# Altium PCB SZG-TEMPLATE-STD.PcbDoc (part 1 of 2)
Units mil, origin at the board's own origin, x right, y up, seen from the top; angles counter-clockwise.
Board outline 1771.65 x 2755.91 mil, 4 copper layers (L1-TOP, L2-GND, L3-3.3V, L4-BOT), stack 60.25 mil thick; 64 components, 79 nets, 292 pads, 121 vias.
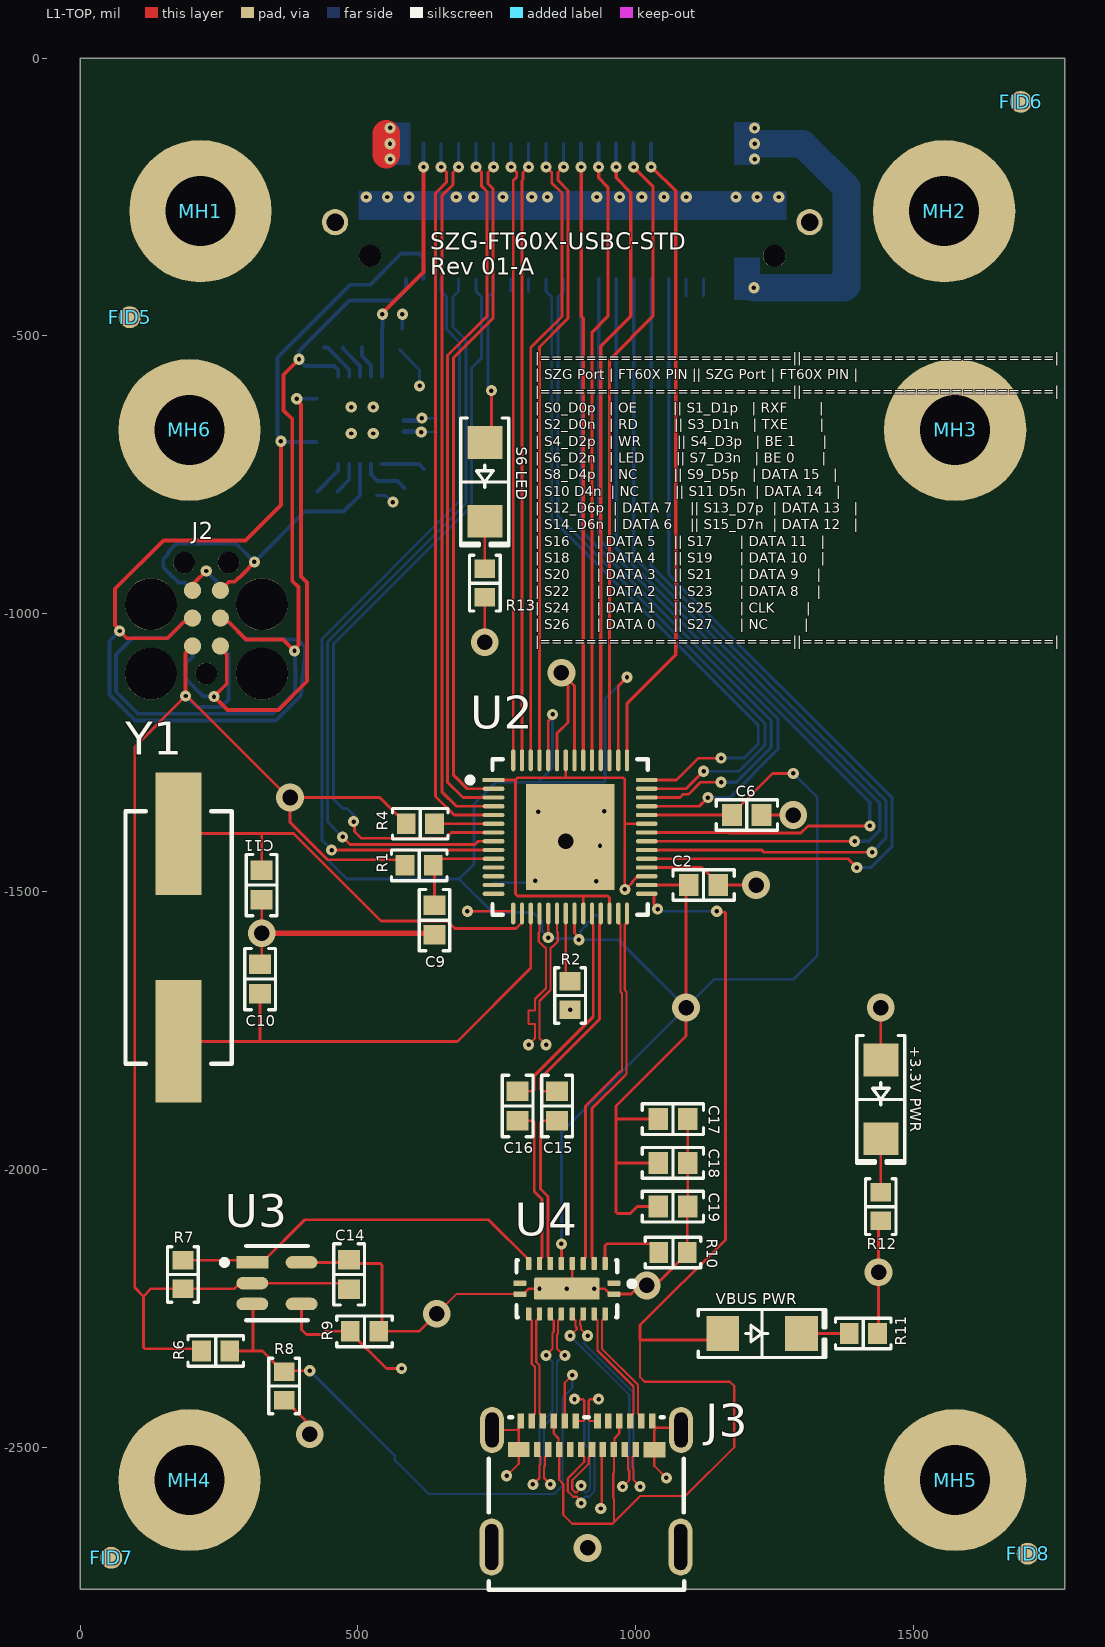
[diagram p0: L1-TOP view]
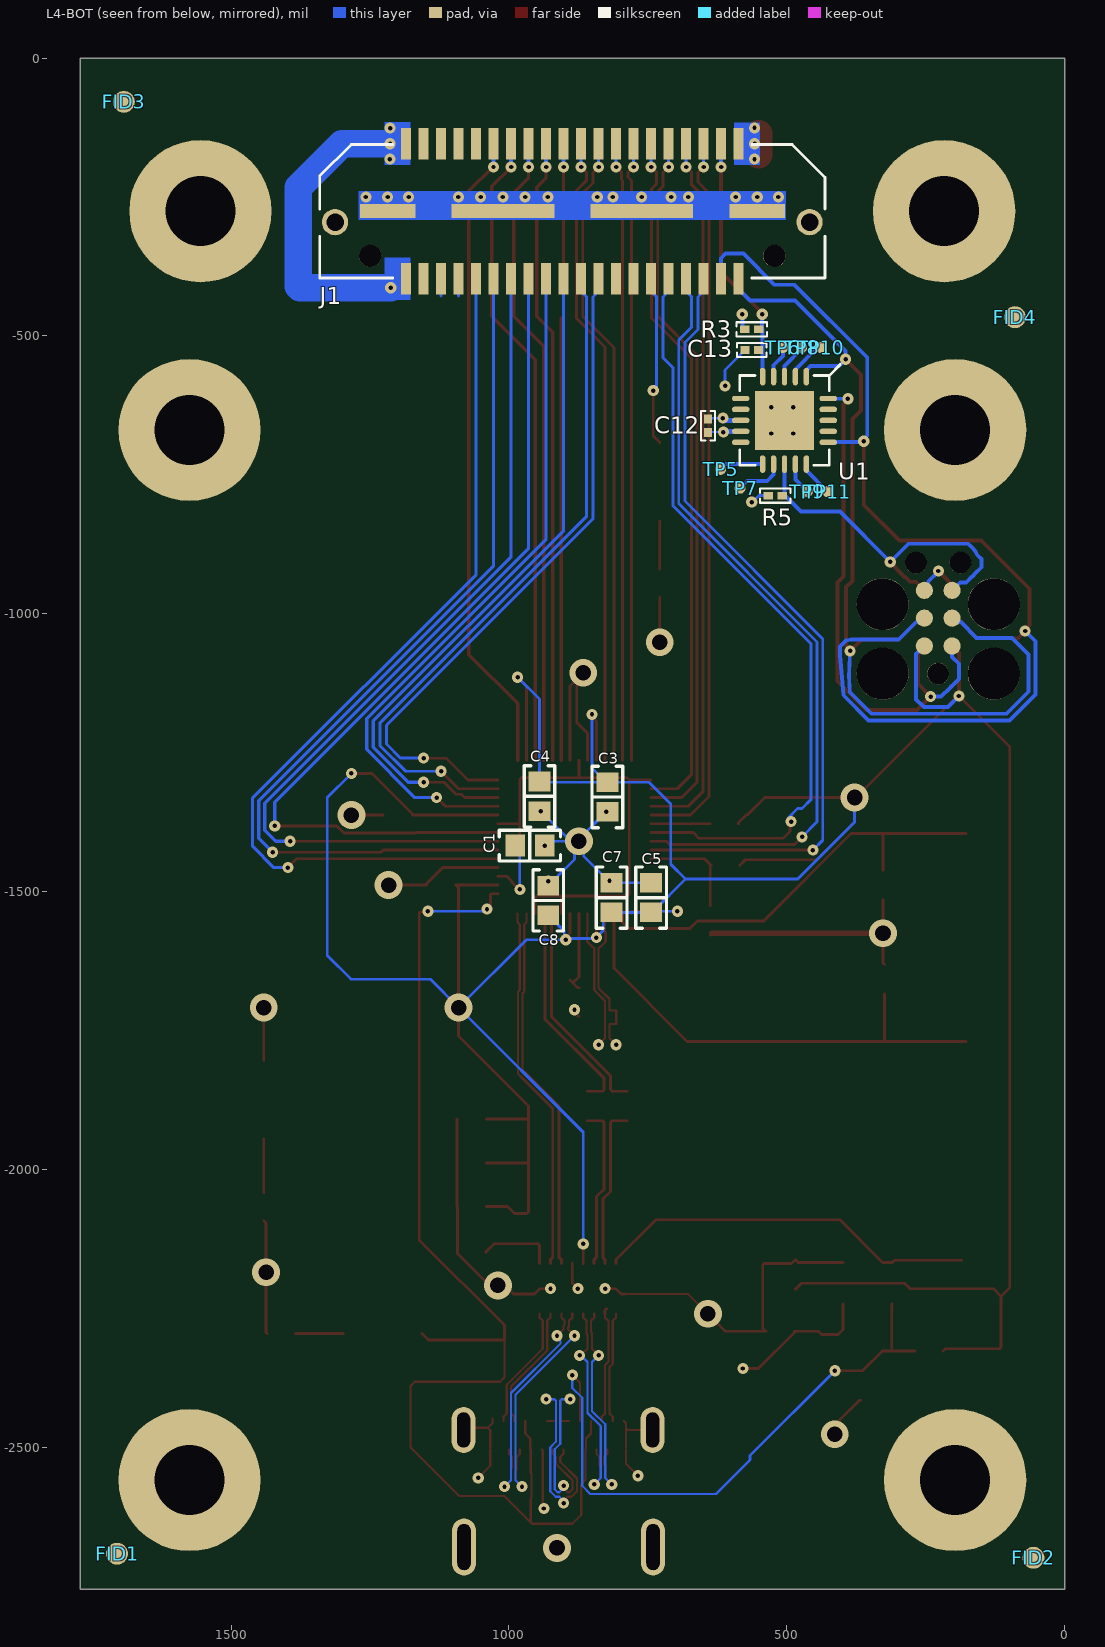
[diagram p1: L4-BOT view, seen from below]
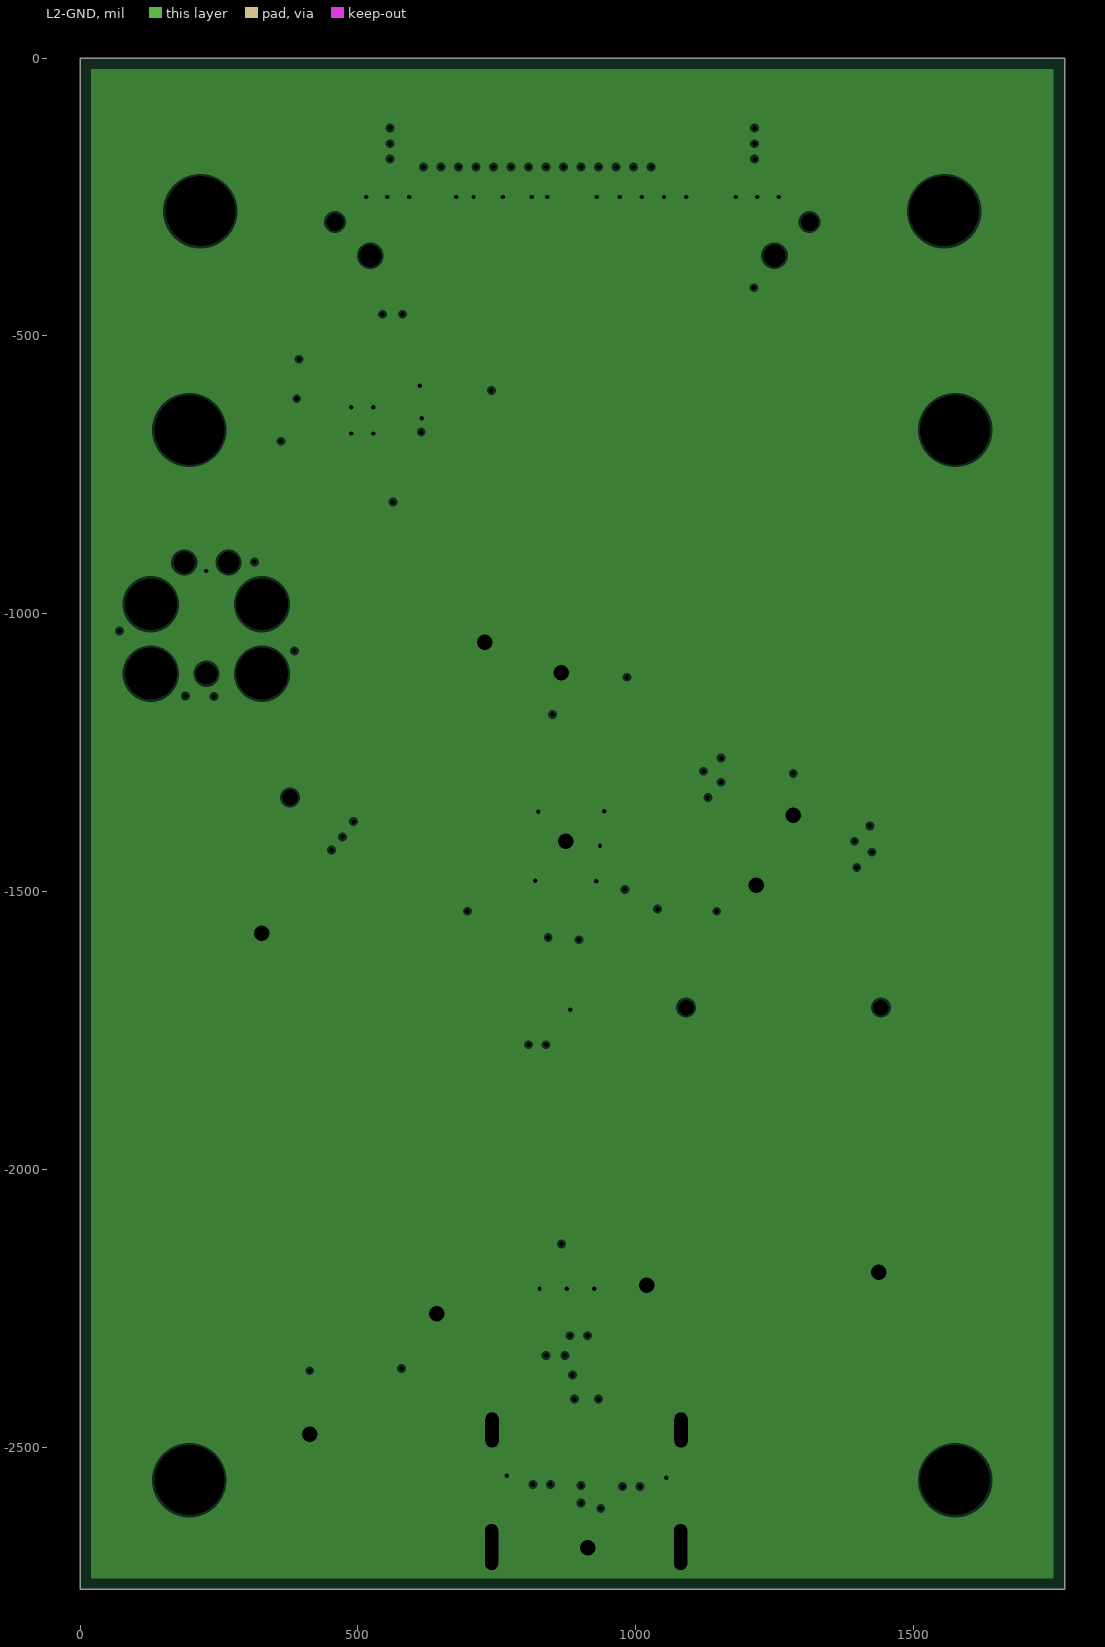
[diagram p2: L2-GND, clearances drawn from the general rule]
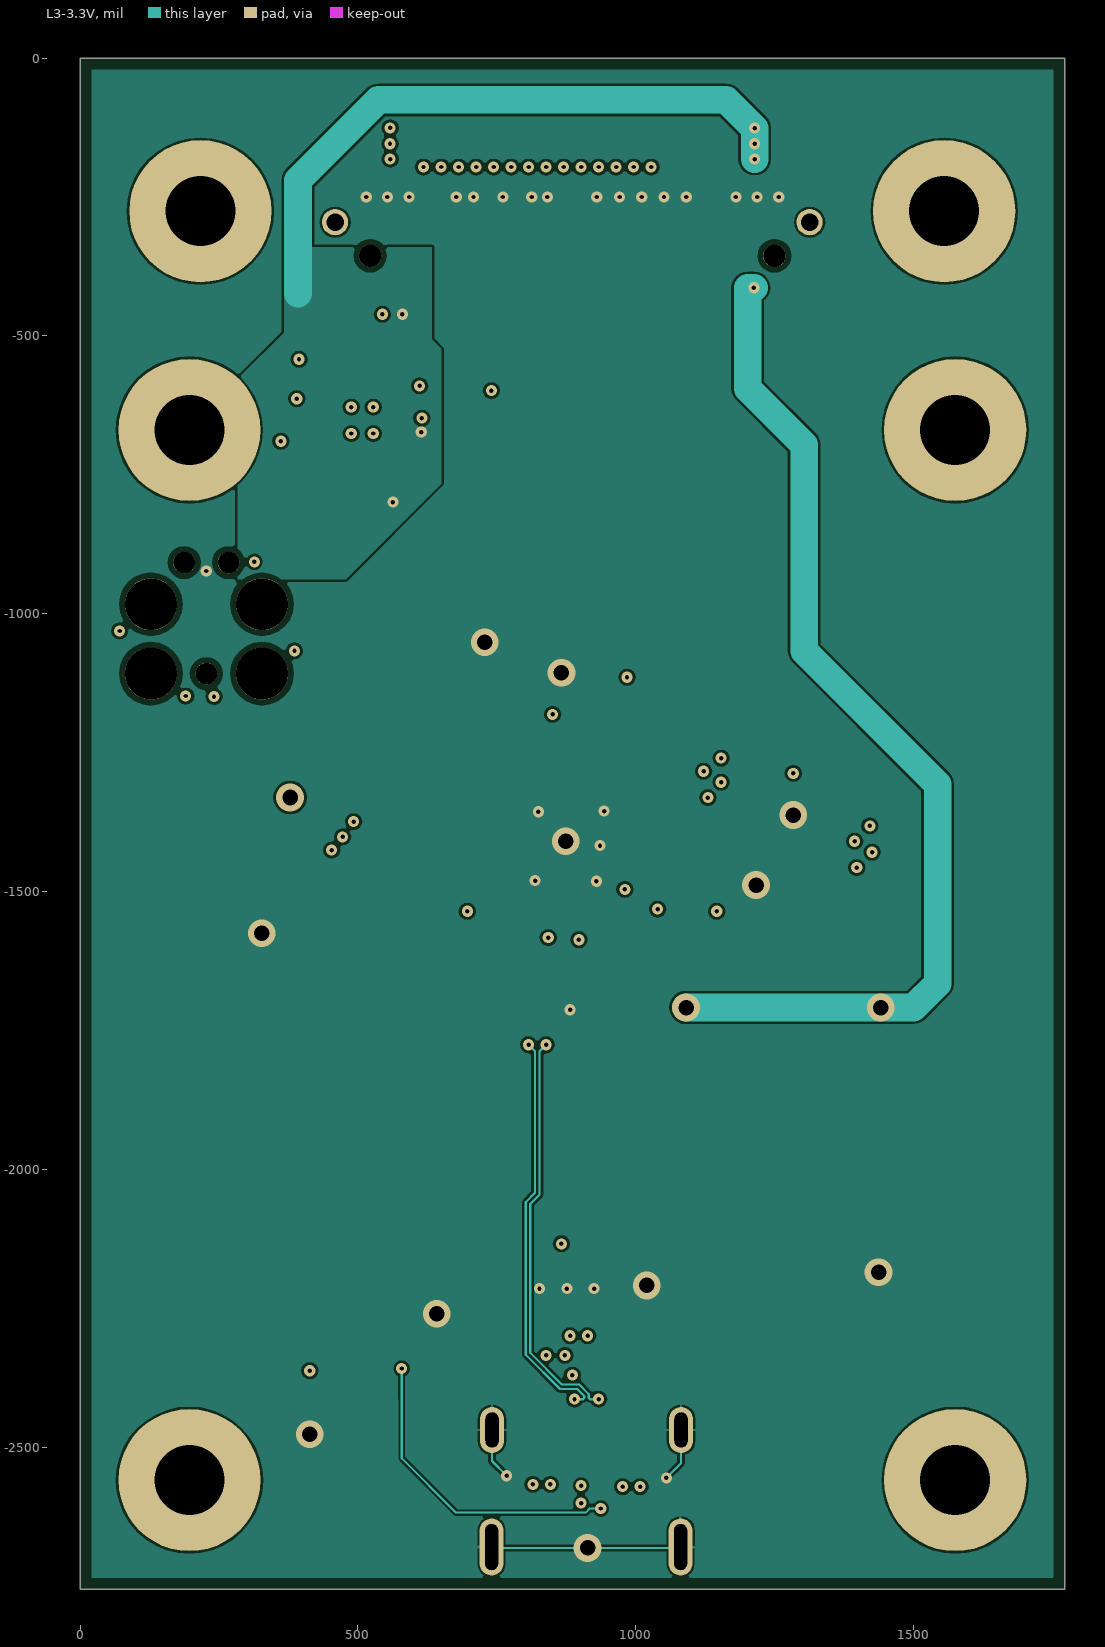
[diagram p3: L3-3.3V]
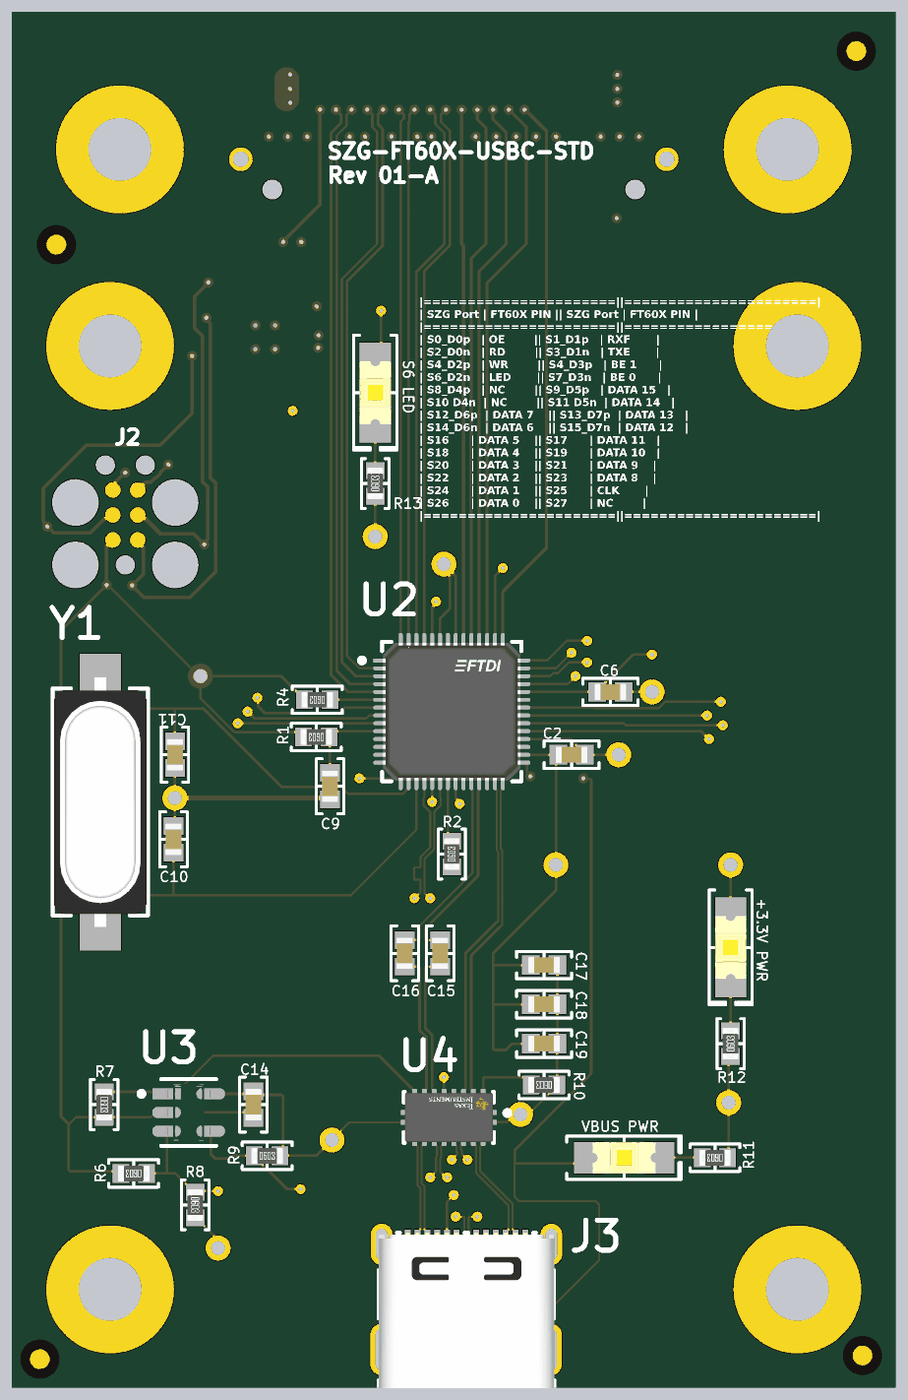
[diagram p5: 3D render of the assembled board from above, using the file's embedded part models]
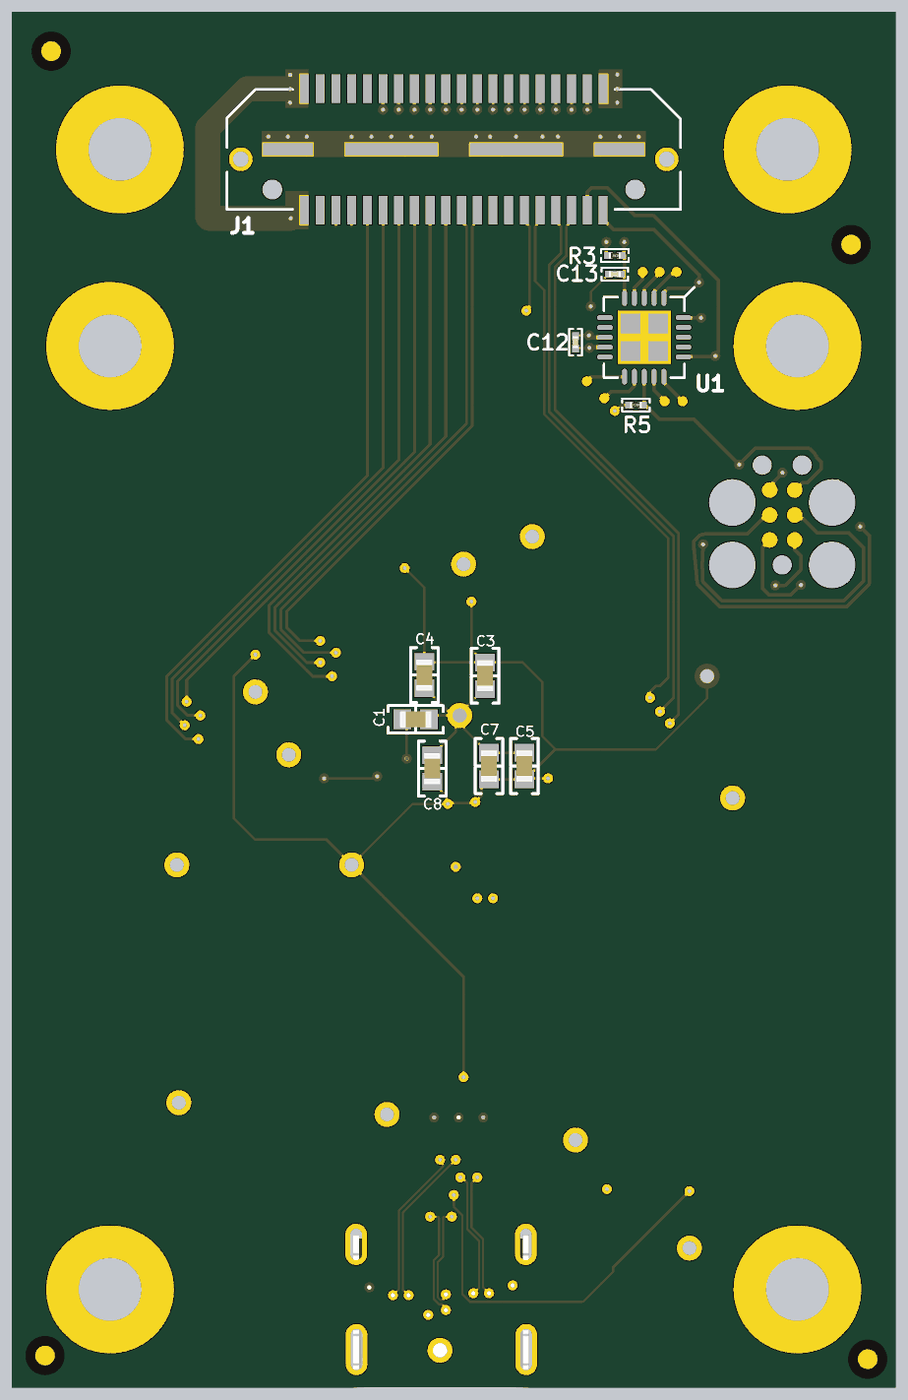
[diagram p6: 3D render of the assembled board from below, using the file's embedded part models]

## Layer stack, top to bottom
Top Solder: solder mask 0.4, Solder Resist, Dk 3.9
L1-TOP: signal copper 1.4
Dielectric1: prepreg 5.08, IT180A, Dk 4.2
L2-GND: plane copper 1.4, net GND
Dielectric2: core 44.49, IT180A, Dk 4.2
L3-3.3V: signal copper 1.4
Dielectric3: prepreg 5.08, IT180A, Dk 4.2
L4-BOT: signal copper 1.4
Bottom Solder: solder mask 0.4, Solder Resist, Dk 3.9

## Board outline
0,-2755.91 1771.65,-2755.91 1771.65,0 0,0

## Design rules (kind name [scope] priority, off if disabled: settings)
BoardOutlineClearance [All] p1: gap=7.87 ignorepadtopadclearanceinfootprint=FALSE
Clearance [All] p1: gap=4 ignorepadtopadclearanceinfootprint=TRUE except(5: Arc-Via Track-Via SMDPad-Via THPad-Via Via-Via Via-Fill Via-Poly Via-Region Via-Text; 10: Arc-Hole Track-Hole SMDPad-Hole THPad-Hole Via-Hole Fill-Hole Poly-Hole Region-Hole Text-Hole)
ComponentClearance [All] p1: gap=4 collisioncheckmode=3 verticalgap=4 showdistances=TRUE
DiffPairsRouting [All] p1: maxlimit=4 minlimit=4 mostfreqgap=4 toplayer_minwidth=4 toplayer_maxwidth=71497.94 toplayer_prefwidth=4 midlayer6_minwidth=4 midlayer6_maxwidth=71497.94 midlayer6_prefwidth=4 bottomlayer_minwidth=4 bottomlayer_maxwidth=71497.94 bottomlayer_prefwidth=4 maxuncoupledlength=500
Height [All] p1: minheight=0 maxheight=71497.94 prefheight=500
HoleSize [All] p1: absolutevalues=TRUE maxlimit=248.03 minlimit=7.87 maxpercent=80.000 minpercent=20.000
HoleToHoleClearance [All] p1: gap=10 allowstackedmicrovias=FALSE
MatchedLengths MatchedLengths_USB_DiffPairs [All] p1: tolerance=5 checknetsindiffpair=TRUE checkdiffpairvsdiffpair=FALSE checkxsignals=FALSE checkothers=FALSE
MinimumAnnularRing [All] p1: minimumring=6
MinimumSolderMaskSliver [All] p1: minsoldermaskwidth=6
PlaneClearance [All] p1: clearance=4
PlaneConnect PlaneConnectPowerPads [InPadClass('PowerPads')] p1: planeconnectstyle=Direct reliefexpansion=20 reliefentries=4 reliefconductorwidth=10 reliefairgap=10
PlaneConnect [All] p2: pad.planeconnectstyle=Relief pad.reliefexpansion=11.81 pad.reliefentries=4 pad.reliefconductorwidth=4 pad.reliefairgap=4 via.planeconnectstyle=Direct via.reliefexpansion=11.81 via.reliefentries=4 via.reliefconductorwidth=5 via.reliefairgap=5
PolygonConnect PolygonConnectPowerPads [All vs (InPadClass('PowerPads'))] p1: connectstyle=Direct reliefconductorwidth=10 reliefentries=4 polygonreliefangle="90 Angle" airgapwidth=10
PolygonConnect [All] p2: thpad.connectstyle=Relief thpad.reliefconductorwidth=4 thpad.reliefentries=4 thpad.polygonreliefangle="90 Angle" thpad.airgapwidth=4 smdpad.connectstyle=Relief smdpad.reliefconductorwidth=4 smdpad.reliefentries=4 smdpad.polygonreliefangle="90 Angle" smdpad.airgapwidth=4 via.connectstyle=Direct via.reliefconductorwidth=5 via.reliefentries=4 via.polygonreliefangle="90 Angle" via.airgapwidth=5
RoomDefinition SZG-TEMPLATE-STD [InComponentClass('SZG-TEMPLATE-STD')] p1: confinementstyle=ConfineIn formatcopy=TRUE lockcomponents=FALSE outline -1685.04,-5834.65 314.96,-5834.65 314.96,-4834.65 -1685.04,-4834.65
RoutingVias [All] p1: holewidth=7.87 width=17.72 viastyle="Through Hole" minholewidth=7.87 minwidth=17.72 maxholewidth=248.03 maxwidth=257.87
SilkToSilkClearance [All] p1: silktosilkclearance=5
SilkToSolderMaskClearance [IsPad] p1: minsilkscreentomaskgap=5 clearancetoexposedcopper=TRUE
SolderMaskExpansion [All] p1: expansion=2 istentingtop=FALSE
UnRoutedNet [All] p1: checkbadconnections=TRUE
Width Power_20mil [All] p1 off: maxlimit=1000 minlimit=10 preferedwidth=20 toplayer_minwidth=20 midlayer6_maxwidth=10 midlayer6_prefwidth=10 bottomlayer_minwidth=20 minimp=50.000000 maximp=50.000000 favimp=50.000000
Width Power_12mil [All] p2 off: maxlimit=1000 minlimit=10 preferedwidth=12 toplayer_minwidth=12 midlayer6_maxwidth=10 midlayer6_prefwidth=10 bottomlayer_minwidth=12 minimp=50.000000 maximp=50.000000 favimp=50.000000
Width Width_10mil [All] p3 off: maxlimit=1000 minlimit=10 preferedwidth=10 midlayer6_maxwidth=10 minimp=50.000000 maximp=50.000000 favimp=50.000000
Width Width_6mil [All] p4 off: maxlimit=1000 minlimit=6 preferedwidth=10 toplayer_prefwidth=6 midlayer6_minwidth=10 midlayer6_maxwidth=10 bottomlayer_prefwidth=6 minimp=50.000000 maximp=50.000000 favimp=50.000000
Width Width_4mil [All] p5: maxlimit=71497.94 minlimit=4 preferedwidth=4 toplayer_maxwidth=1000 bottomlayer_maxwidth=1000 minimp=50.000000 maximp=50.000000 favimp=50.000000
19 further rules are at their usual default settings.

## Classes and differential pairs
component class USBC: C14 C15 C16 C17 C18 C19 J3 R6 R7 R8 R9 R10 U3 U4
component class FTDI_60X: "+3.3v pwr" C1 C2 C3 C4 C5 C6 C7 C8 C9 C10 C11 R1 R2 R4 R11 R12 U2 "VBUS PWR" Y1
component class SZG-TEMPLATE-STD: ASSY1 C12 C13 FID1 FID2 FID3 FID4 FID5 FID6 FID7 FID8 J1 J2 LABEL1 MH1 MH2 MH3 MH4 MH5 MH6 PCB1 R3 R5 R13 "S6 LED" TP5 TP6 TP7 TP8 TP9 TP10 TP11 U1
differential pair D_D: +DA_P -DA_N
differential pair D_DCBLOCKED_TX: +DCBLOCKED_TX_P -DCBLOCKED_TX_N
differential pair D_RX1: +RX1_P -RX1_N
differential pair D_RX2: +RX2_P -RX2_N
differential pair D_RX: +RX_P -RX_N
differential pair D_TX1: +TX1_P -TX1_N
differential pair D_TX2: +TX2_P -TX2_N
differential pair D_TX: +TX_P -TX_N
differential pair DXBLOCKED_TX: +DCBLOCKED_TX_P -DCBLOCKED_TX_N
differential pair DP_C2P_CLK: +C2P_CLKP -C2P_CLKN
differential pair DP_P2C_CLK: +P2C_CLKP -P2C_CLKN

## Components (designator, comment, footprint, x,y, rotation, side; value= is the part's Value field where it differs from the comment)
"+3.3V PWR" "Yellow" "LED 1206_3216 YELLOW" 1440.94,-1874.02 r270 top (schematic designator D2)
C1 "C0402C104K8PACTU" "CAP 0603_1608" 962.2,-1417.32 r0 bottom value="4.7 µF"
C2 "C0402C104K8PACTU" "CAP 0603_1608" 1199.8,-1362.2 r180 top value="0.1 µF"
C3 "0.1 µF" "CAP 0603_1608" 822.83,-1329.72 r90 bottom
C4 "0.1 µF" "CAP 0603_1608" 944.88,-1328.57 r90 bottom
C5 "0.1 µF" "CAP 0603_1608" 744.09,-1510.83 r270 bottom
C6 "0.1 µF" "CAP 0603_1608" 1122.05,-1488.19 r180 top
C7 "0.1 µF" "CAP 0603_1608" 815.13,-1510.83 r270 bottom
C8 "0.1 µF" "CAP 0603_1608" 929.13,-1515.92 r270 bottom
C9 "0.1 µF" "CAP 0603_1608" 637.8,-1551.35 r90 top
C10 "18pF" "CAP 0603_1608" 326.77,-1488.19 r90 top
C11 "18pF" "CAP 0603_1608" 323.99,-1657.48 r270 top
C12 "0.1 µF" "CAP 0201_0603" 641.73,-661.81 r90 bottom
C13 "0.1 µF" "CAP 0201_0603" 562.99,-525.31 r180 bottom
C14 "0.1 µF" "CAP 0603_1608" 484.25,-2188.98 r270 top
C15 "0.1 µF" "CAP 0603_1608" 858.44,-1885.83 r90 top
C16 "0.1 µF" "CAP 0603_1608" 787.4,-1885.83 r90 top
C17 "10000 pF" "CAP 0603_1608" 1066.93,-1909.45 r180 top
C18 "0.1 µF" "CAP 0603_1608" 1066.93,-1988.19 r0 top
C19 "10 µF" "CAP 0603_1608" 1066.93,-2066.93 r180 top
FID1 "FIDUCIAL" FID1MM/2MM-SS 1705.21,-2691.54 r90 bottom
FID2 "FIDUCIAL" FID1MM/2MM-SS 56,-2698.85 r90 bottom
FID3 "FIDUCIAL" FID1MM/2MM-SS 1692.91,-78.74 r90 bottom
FID4 "FIDUCIAL" FID1MM/2MM-SS 89.25,-466.27 r90 bottom
FID5 "FIDUCIAL" FID1MM/2MM-SS 89.25,-466.27 r90 top
FID6 "FIDUCIAL" FID1MM/2MM-SS 1692.91,-78.74 r90 top
FID7 "FIDUCIAL" FID1MM/2MM-SS 56,-2698.85 r90 top
FID8 "FIDUCIAL" FID1MM/2MM-SS 1705.21,-2691.54 r90 top
J1 "QTE-020-01-F-D-A" QTE-020-01-X-D-A-L 885.83,-275.59 r0 bottom
J2 "" TC2030-DUAL 227.36,-1107.87 r90 top
J3 "1054500101" "Molex 1054500101" 911.42,-2478.54 r0 top locked
MH1 "MTG" MTG-3.2/6.5-PTH 216.54,-275.59 r0 top locked
MH2 "MTG" MTG-3.2/6.5-PTH 1555.12,-275.59 r0 top locked
MH3 "MTG" MTG-3.2/6.5-PTH 1574.8,-669.29 r0 top locked
MH4 "MTG" MTG-3.2/6.5-PTH 196.85,-2559.06 r0 top locked
MH5 "MTG" MTG-3.2/6.5-PTH 1574.8,-2559.06 r0 top locked
MH6 "MTG" MTG-3.2/6.5-PTH 196.85,-669.29 r0 top locked
R1 "CRCW040210K0FKED" "RES 0603_1608" 610.24,-1452.76 r180 top value="10 kOhms"
R2 "CRCW040210K0FKED" "RES 0603_1608" 881.89,-1687.01 r90 top value="1.6 kOhms"
R3 "10 kOhms" "RES 0201_0603" 562.99,-488.19 r0 bottom
R4 "CRCW040210K0FKED" "RES 0603_1608" 612.2,-1377.95 r180 top value="10 kOhms"
R5 "10 kOhms" "RES 0201_0603" 520.67,-787.4 r0 bottom
R6 "100 kOhms" "RES 0603_1608" 244.09,-2326.77 r180 top
R7 "10 kOhms" "RES 0603_1608" 185.04,-2188.98 r270 top
R8 "5.1 kOhms" "RES 0603_1608" 367.32,-2389.76 r270 top
R9 "5.1 kOhms" "RES 0603_1608" 511.81,-2291.34 r0 top
R10 "10 kOhms" "RES 0603_1608" 1066.93,-2149.61 r180 top
R11 "150 Ohms" "RES 0603_1608" 1409.45,-2295.28 r180 top
R12 "330 Ohms" "RES 0603_1608" 1440.94,-2066.93 r90 top
R13 "330 Ohms" "RES 0603_1608" 728.35,-944.88 r90 top
"S6 LED" "Yellow" "LED 1206_3216 YELLOW" 728.35,-762.79 r270 top (schematic designator D3)
TP5 "TESTPOINT-SMD20" TP-SMD20 619,-740 r90 bottom
TP6 "TESTPOINT-SMD20" TP-SMD20 507,-521 r90 bottom
TP7 "TESTPOINT-SMD20" TP-SMD20 584,-774 r90 bottom
TP8 "TESTPOINT-SMD20" TP-SMD20 473,-521 r90 bottom
TP9 "TESTPOINT-SMD20" TP-SMD20 463,-780 r90 bottom
TP10 "TESTPOINT-SMD20" TP-SMD20 439,-521 r90 bottom
TP11 "TESTPOINT-SMD20" TP-SMD20 427,-780 r90 bottom
U1 "ATTINY44A-MU" QFN-EP-20 504,-652 r270 bottom
U2 "FT600Q-B-T" FP-QFN-56-MFG 881.89,-1401.57 r0 top
U3 "MIC7221YM5-TR" FP-SOT23-5LD-PL-1-IPC_B 354.33,-2204.72 r0 top
U4 "HD3SS3212RKSR" FP-RKS0020A-MFG 875.98,-2214.57 r270 top
"VBUS PWR" "Yellow" "LED 1206_3216 YELLOW" 1227.35,-2295.28 r0 top (schematic designator D1)
Y1 "30MHz" "ABRACON ABLS" 177.17,-1582.68 r270 top

## Footprints (in the part's own frame and the unit in brackets; to place one, negate y for a bottom-side part, rotate by r counter-clockwise, add the part's x,y. Pads: shape width x height; smd on the part's side, far side on the other; paste and mask are expansions set on the pad)
"ABRACON ABLS" [mm] "Crystal, 2-Leads, Body 4.70x11.40mm, Pitch 8.80mm, IPC Medium Density"
  rect 5.6x2.1 smd: 1(-4.75,0) 2(4.75,0)
  silkscreen extent -5.77,-2.43 5.77,2.43, body extent -6.35,-2.35 6.35,2.35, height 4.2
"CAP 0201_0603" [mm] "Chip Capacitor, 2-Leads, Body 0.60x0.30mm, IPC Medium Density"
  rect 0.4x0.35 smd: 1(-0.31,0) 2(0.31,0)
  silkscreen extent -0.67,-0.33 0.67,0.33, body extent -0.3,-0.15 0.3,0.15, height 0.3
"CAP 0603_1608" [mm] "Chip Capacitor, 2-Leads, Body 1.60x0.80mm, IPC Medium Density"
  rect 0.9x1 smd: 1(-0.675,0) 2(0.675,0)
  silkscreen extent -1.4,-0.7 1.4,0.7, body extent -0.8,-0.41 0.8,0.41, height 0.82
FID1MM/2MM-SS [mm] "Fiducial 1mm copper, 2mm soldermask, single-side"
  round 1 smd paste-0.5 mask+0.5: FID?(0,0)
FP-QFN-56-MFG [mm]
  rect 1x0.2 smd paste+0 mask+0: 1(-3.5,2.6)
  rrect100% 1x0.2 smd paste+0 mask+0: 2(-3.5,2.2) 3(-3.5,1.8) 4(-3.5,1.4) 5(-3.5,1) 6(-3.5,0.6) 7(-3.5,0.2) 8(-3.5,-0.2) 9(-3.5,-0.6) 10(-3.5,-1) 11(-3.5,-1.4) 12(-3.5,-1.8) 13(-3.5,-2.2) 14(-3.5,-2.6) 29(3.5,-2.6) 30(3.5,-2.2) 31(3.5,-1.8) 32(3.5,-1.4) 33(3.5,-1) 34(3.5,-0.6) 35(3.5,-0.2) 36(3.5,0.2) 37(3.5,0.6) 38(3.5,1) 39(3.5,1.4) 40(3.5,1.8) 41(3.5,2.2) 42(3.5,2.6)
  rrect100% 0.2x1 smd paste+0 mask+0: 15(-2.6,-3.5) 16(-2.2,-3.5) 17(-1.8,-3.5) 18(-1.4,-3.5) 19(-1,-3.5) 20(-0.6,-3.5) 21(-0.2,-3.5) 22(0.2,-3.5) 23(0.6,-3.5) 24(1,-3.5) 25(1.4,-3.5) 26(1.8,-3.5) 27(2.2,-3.5) 28(2.6,-3.5) 43(2.6,3.5) 44(2.2,3.5) 45(1.8,3.5) 46(1.4,3.5) 47(1,3.5) 48(0.6,3.5) 49(0.2,3.5) 50(-0.2,3.5) 51(-0.6,3.5) 52(-1,3.5) 53(-1.4,3.5) 54(-1.8,3.5) 55(-2.2,3.5) 56(-2.6,3.5)
  rect 4.05x4.85 smd paste+0 mask+0: 57(0,0)
  silkscreen extent -4.7,-3.55 3.55,3.55, body extent -4.1,-4.1 4.1,4.1, height 0.25
FP-RKS0020A-MFG [mm]
  rrect40% 0.25x0.6 smd paste+0 mask+0: 1(-0.25,2.15) 10(-0.25,-2.15) 11(0.25,-2.15) 20(0.25,2.15)
  rrect40% 0.6x0.25 smd paste+0 mask+0: 2(-1.15,1.75) 3(-1.15,1.25) 4(-1.15,0.75) 5(-1.15,0.25) 6(-1.15,-0.25) 7(-1.15,-0.75) 8(-1.15,-1.25) 9(-1.15,-1.75) 12(1.15,-1.75) 13(1.15,-1.25) 14(1.15,-0.75) 15(1.15,-0.25) 16(1.15,0.25) 17(1.15,0.75) 18(1.15,1.25) 19(1.15,1.75)
  rrect10% 1x3 smd paste-1000 mask+0: 21(0,0)
  silkscreen extent -1.3,-2.3 1.3,3.1, body extent -1.55,-2.55 1.55,2.55, height 0.25
FP-SOT23-5LD-PL-1-IPC_B [mm]
  rect 1.456x0.57 smd paste+0 mask+0: 1(-1.125,0.95)
  rrect100% 1.456x0.57 smd paste+0 mask+0: 2(-1.125,0) 3(-1.125,-0.95) 4(1.125,-0.95) 5(1.125,0.95)
  silkscreen extent -2.53,-1.7 1.4,1.7, body extent -2.1,-1.7 2.1,1.7, height 0.25
"LED 1206_3216 YELLOW" [mm] "Chip Diode, 2-Leads, Body 3.13x1.55mm, IPC Medium Density"
  rect 1.5x1.6 smd: 1(-1.8,0) 2(1.8,0)
  silkscreen extent -2.92,-1.1 2.92,1.1, body extent -1.6,-0.8 1.6,0.8, height 0.9
"Molex 1054500101" [mm] "USB-C Receptacle Connector 24 Position Surface Mount, 24 Position, Body 8.94x7.90mm"
  rect 0.3x0.7 smd: A1(-3,0.655) A2(-2.5,0.655) A3(-2,0.655) A4(-1.5,0.655) A5(-1,0.655) A6(-0.5,0.655) A7(0.5,0.655) A8(1,0.655) A9(1.5,0.655) A10(2,0.655) A11(2.5,0.655) A12(3,0.655) B2(2.25,-0.645) B3(1.75,-0.645) B4(1.25,-0.645) B5(0.75,-0.645) B6(0.25,-0.645) B7(-0.25,-0.645) B8(-0.75,-0.645) B9(-1.25,-0.645) B10(-1.75,-0.645) B11(-2.25,-0.645)
  rect 1x0.7 smd: B1(3.1,-0.655) B12(-3.1,-0.645)
  oval 1.1x2.6 hole 2.1 slot 0.6 at 0 deg unplated: S(-4.34,-5.105) S(4.3,-5.105)
  oval 1.1x2.1 hole 1.6 slot 0.6 at 0 deg unplated: S(-4.32,0.245) S(4.32,0.245)
  silkscreen extent -4.47,-7.07 4.47,0.83, body extent -4.47,-7.07 4.47,0.83, height 3.21
MTG-3.2/6.5-PTH [mm] "Mounting hole, 3.2mm ID, 6.5mm OD, plated"
  round 6.5 hole 3.2: 1(0,0)
QFN-EP-20 [mm]
  oval 0.8x0.25 smd mask+0.051: 1(-2,1) 2(-2,0.5) 3(-2,0) 4(-2,-0.5) 5(-2,-1) 11(2,-1) 12(2,-0.5) 13(2,0) 14(2,0.5) 15(2,1)
  oval 0.25x0.8 smd mask+0.051: 6(-1,-2) 7(-0.5,-2) 8(0,-2) 9(0.5,-2) 10(1,-2) 16(1,2) 17(0.5,2) 18(0,2) 19(-0.5,2) 20(-1,2)
  rect 2.7x2.7 smd paste-100 mask+0.051: PAD(0,0)
  silkscreen extent -2.55,-2.05 2.05,2.55
QTE-020-01-X-D-A-L [mm] "0.80mm, 40 pin Surface Mount connectors with Ground Strip"
  rect 2.54x0.64 smd paste+0: 0(-8.445,0) 0(8.445,0)
  rect 4.699x0.64 smd paste+0: 0(-3.175,0) 0(3.175,0)
  rect 0.46x1.45 smd paste+0: 1(-7.6,3.09) 2(-7.6,-3.09) 3(-6.8,3.09) 4(-6.8,-3.09) 5(-5.999,3.09) 6(-5.999,-3.09) 7(-5.199,3.09) 8(-5.199,-3.09) 9(-4.399,3.09) 10(-4.399,-3.09) 11(-3.599,3.09) 12(-3.599,-3.09) 13(-2.799,3.09) 14(-2.799,-3.09) 15(-1.999,3.09) 16(-1.999,-3.09) 17(-1.199,3.09) 18(-1.199,-3.09) 19(-0.399,3.09) 20(-0.399,-3.09) 21(0.401,3.09) 22(0.401,-3.09) 23(1.201,3.09) 24(1.201,-3.09) 25(2.002,3.09) 26(2.002,-3.09) 27(2.802,3.09) 28(2.802,-3.09) 29(3.602,3.09) 30(3.602,-3.09) 31(4.402,3.09) 32(4.402,-3.09) 33(5.202,3.09) 34(5.202,-3.09) 35(6.002,3.09) 36(6.002,-3.09) 37(6.802,3.09) 38(6.802,-3.09) 39(7.602,3.09) 40(7.602,-3.09)
  round 1.2 hole 0.8 paste-2539.97: MH(-10.845,0.5) MH(10.845,0.5)
  round 1.02 hole 1.02 unplated paste-2539.97: MH(-9.24,2.04) MH(9.24,2.04)
  silkscreen extent -11.55,-3.05 11.55,3.05
"RES 0201_0603" [mm] "Chip Resistor, 2-Leads, Body 0.60x0.30mm, IPC Medium Density"
  rect 0.44x0.35 smd: 1(-0.325,0) 2(0.325,0)
  silkscreen extent -0.7,-0.33 0.7,0.33, body extent -0.3,-0.15 0.3,0.15, height 0.21
"RES 0603_1608" [mm] "Chip Resistor, 2-Leads, Body 1.60x0.80mm, IPC Medium Density"
  rect 0.85x0.95 smd: 1(-0.65,0) 2(0.65,0)
  silkscreen extent -1.27,-0.7 1.27,0.7, body extent -0.8,-0.4 0.8,0.4, height 0.45
TC2030-DUAL [mil]
  round 31 smd paste-393.7: 1(50,-25) 2(50,25) 3(100,-25) 4(100,25) 5(150,-25) 6(150,25)
  round 31 smd far side paste-393.7: 1(50,25) 2(50,-25) 3(100,25) 4(100,-25) 5(150,25) 6(150,-25)
  round 39 hole 39 unplated: A(0,0) B(200,40) C(200,-40)
  round 93.5 hole 93.5 unplated: D(0,-100) E(125,-100) F(0,100) G(125,100)
TP-SMD20 [mil] "Test point, surface-mount, 20mil"
  round 20 smd paste-78.74: 1(0,0)

## Part data
"+3.3V PWR" "S6 LED" "VBUS PWR": library part CMD11-21VYC/TR8, "LED YELLOW CLEAR 1206 SMD", Current - Test=20mA, Device Package="1206 (3216 Metric)", Lens Color=1.50mm, Manufacturer="Visual Communications Company - VCC", Millicandela Rating=6mcd, Supplier Device Package=1206, Supplier Part Number 1=28-CMD11-21VYC/TR8CT-ND, Voltage - Forward (Vf) (Typ)=2V, Color=Yellow, componentlink1description=Datasheet, componentlink1url=https://vcclite.com/wp-content/uploads/wpallimport/files/files/CMD11-21%20SMT%20LEDs%201206%20Package%20Size.pdf, componentlink2description="DigiKey Link", componentlink2url=https://www.digikey.com/en/products/detail/visual-communications-company-vcc/CMD11-21VYC-TR8/254830, Configuration=Standard, Height (Max)=1.50mm, lastupdated="12/21/2023 9:31:44 PM", Lens Size="1.10mm Dia", Lens Style="Round with Flat Top", Lens Transparency=Clear, Lifecycle Status=Active, Minimum Order=1, Mounting Type="Surface Mount", Package / Case="1206 (3216 Metric)", packaging=TapeAndReel, Part Number=CMD11-21VYC/TR8, Part Status=Active, partid=6, price=0.22, series=-, Size / Dimension="3.00mm L x 1.50mm W", Supplier 1=DigiKey, Viewing Angle=20°, Wavelength - Peak=585nm
C1: library part CL10A475KA8NQNC, "CAP CER 4.7UF 25V X5R 0603", Capacitance="4.7 µF", Device Package="0603 (1608 Metric)", Manufacturer="Samsung Electro-Mechanics", Operating Temperature="-55°C ~ 85°C", Supplier Part Number 1=1276-1900-1-ND, Temperature Coefficient=X5R, Tolerance=±10%, Voltage - Rated=25V, Applications="General Purpose", componentlink1description=Datasheet, componentlink1url=http://www.samsungsem.com/kr/support/product-search/mlcc/CL10A475KA8NQNC.jsp, componentlink2description="DigiKey Link", componentlink2url=https://www.digikey.com/en/products/detail/samsung-electro-mechanics/CL10A475KA8NQNC/3887558, lastupdated="12/20/2023 8:09:25 PM", Lifecycle Status=Active, Minimum Order=1, Mounting Type="Surface Mount, MLCC", Package / Case="0603 (1608 Metric)", packaging=TapeAndReel, Part Number=CL10A475KA8NQNC, Part Status=Active, partid=2349, price=0.06, series=CL, Size / Dimension="0.063\" L x 0.031\" W (1.60mm x 0.80mm)", Supplier 1=DigiKey, Thickness (Max)="0.035\" (0.90mm)"
C2: library part C0603C104K5RAC7411, "CAP CER 0.1UF 50V X7R 0603", Capacitance="0.1 µF", Device Package="0603 (1608 Metric)", Manufacturer=KEMET, Operating Temperature="-55°C ~ 125°C", Supplier Part Number 1=399-C0603C104K5RAC7411CT-ND, Temperature Coefficient=X7R, Tolerance=±10%, Voltage - Rated=50V, Applications="Bypass, Decoupling", componentlink1description=Datasheet, componentlink1url=https://api.kemet.com/component-edge/download/datasheet/C0603C104K5RAC7411.pdf, componentlink2description="DigiKey Link", componentlink2url=https://www.digikey.com/en/products/detail/kemet/C0603C104K5RAC7411/3317013, lastupdated="12/20/2023 8:09:25 PM", Lifecycle Status=Active, Minimum Order=1, Mounting Type="Surface Mount, MLCC", Package / Case="0603 (1608 Metric)", packaging=TapeAndReel, Part Number=C0603C104K5RAC7411, Part Status=Active, partid=2233, price=0.01, series="SMD Comm X7R", Size / Dimension="0.063\" L x 0.031\" W (1.60mm x 0.80mm)", Supplier 1=DigiKey, Thickness (Max)="0.035\" (0.90mm)"
C3 C4 C5 C6 C7 C8 C9 C14 C15 C16 C18: library part C0603C104K5RAC7411, "CAP CER 0.1UF 50V X7R 0603", Device Package="0603 (1608 Metric)", Manufacturer=KEMET, Operating Temperature="-55°C ~ 125°C", Supplier Part Number 1=399-C0603C104K5RAC7411CT-ND, Temperature Coefficient=X7R, Tolerance=±10%, Voltage - Rated=50V, Applications="Bypass, Decoupling", Capacitance="0.1 µF", componentlink1description=Datasheet, componentlink1url=https://api.kemet.com/component-edge/download/datasheet/C0603C104K5RAC7411.pdf, componentlink2description="DigiKey Link", componentlink2url=https://www.digikey.com/en/products/detail/kemet/C0603C104K5RAC7411/3317013, lastupdated="12/20/2023 8:09:25 PM", Lifecycle Status=Active, Minimum Order=1, Mounting Type="Surface Mount, MLCC", Package / Case="0603 (1608 Metric)", packaging=TapeAndReel, Part Number=C0603C104K5RAC7411, Part Status=Active, partid=2233, price=0.01, series="SMD Comm X7R", Size / Dimension="0.063\" L x 0.031\" W (1.60mm x 0.80mm)", Supplier 1=DigiKey, Thickness (Max)="0.035\" (0.90mm)"
C10 C11: library part SQCSVA180JAT1A, "CAP CER 18PF 250V 0603", Device Package="0603 (1608 Metric)", Manufacturer="AVX Corporation", Operating Temperature="-55°C ~ 125°C", Supplier Part Number 1=478-3505-1-ND, Temperature Coefficient=A, Tolerance=±5%, Voltage - Rated=250V, Applications="RF, Microwave, High Frequency", Capacitance=18pF, componentlink1description=Datasheet, componentlink1url=http://datasheets.avx.com/sqcs-sqcf.pdf, componentlink2description="DigiKey Link", componentlink2url=http://digikey.com/product-detail/en/avx-corporation/SQCSVA180JAT1A/478-3505-1-ND/1000464, Features="High Q, Low Loss", lastupdated="9/2/2020 1:03:34 AM", Lifecycle Status=Active, Minimum Order=1, Mounting Type="Surface Mount, MLCC", Package / Case="0603 (1608 Metric)", packaging=TapeAndReel, Part Number=SQCSVA180JAT1A, Part Status=Active, partid=2987, price=0.22, series=SQ, Size / Dimension="0.063\" L x 0.032\" W (1.60mm x 0.81mm)", Supplier 1=DigiKey, Thickness (Max)="0.030\" (0.76mm)"
C12 C13: library part EMK063BJ104KP-F, "CAP CER 0.1UF 16V X5R 0201", Device Package="0201 (0603 Metric)", Manufacturer="Taiyo Yuden", Operating Temperature="-55°C ~ 85°C", Supplier Part Number 1=587-5833-1-ND, Temperature Coefficient=X5R, Tolerance=±10%, Voltage - Rated=16V, Applications="SMPS Filtering", Capacitance="0.1 µF", componentlink1description=Datasheet, componentlink1url="https://ds.yuden.co.jp/TYCOMPAS/ut/detail?pn=EMK063BJ104KP-F  &u=M", componentlink2description="DigiKey Link", componentlink2url=https://www.digikey.com/en/products/detail/taiyo-yuden/EMK063BJ104KP-F/4970625, lastupdated="12/20/2023 8:01:02 PM", Lifecycle Status=Active, Minimum Order=1, Mounting Type="Surface Mount, MLCC", Package / Case="0201 (0603 Metric)", packaging=TapeAndReel, Part Number=EMK063BJ104KP-F, Part Status=Active, partid=12, price=0.01, series=M, Size / Dimension="0.024\" L x 0.012\" W (0.60mm x 0.30mm)", Supplier 1=DigiKey, Thickness (Max)="0.013\" (0.33mm)"
C17: library part C0603X103K1RAC3316, "CAP CER 0603 10NF 100V X7R", Device Package="0603 (1608 Metric)", Manufacturer=KEMET, Operating Temperature="-55°C ~ 125°C", Ratings=AEC-Q200, Supplier Part Number 1=399-C0603X103K1RAC3316CT-ND, Temperature Coefficient=X7R, Tolerance=±10%, Voltage - Rated=100V, Applications="Automotive, Boardflex Sensitive", Capacitance="10000 pF", componentlink1description=Datasheet, componentlink1url=https://api.kemet.com/component-edge/download/datasheet/C0603X103K1RAC3316.pdf, componentlink2description="DigiKey Link", componentlink2url=https://www.digikey.com/en/products/detail/kemet/C0603X103K1RAC3316/10315782, Features="Soft Termination", lastupdated="12/20/2023 8:09:17 PM", Lifecycle Status=Active, Minimum Order=1, Mounting Type="Surface Mount, MLCC", Package / Case="0603 (1608 Metric)", packaging=TapeAndReel, Part Number=C0603X103K1RAC3316, Part Status=Active, partid=8591, price=0.07, series="SMD Auto X7R VW80808", Size / Dimension="0.063\" L x 0.031\" W (1.60mm x 0.80mm)", Supplier 1=DigiKey, Thickness (Max)="0.037\" (0.95mm)"
C19: library part GRT188R61C106ME13D, "CAP CER 10UF 16V X5R 0603", Device Package="0603 (1608 Metric)", Manufacturer="Murata Electronics", Operating Temperature="-55°C ~ 85°C", Ratings=AEC-Q200, Supplier Part Number 1=490-12318-1-ND, Temperature Coefficient=X5R, Tolerance=±20%, Voltage - Rated=16V, Applications=Automotive, Capacitance="10 µF", componentlink1description=Datasheet, componentlink1url=https://search.murata.co.jp/Ceramy/image/img/A01X/G101/ENG/GRT188R61C106ME13-01.pdf, componentlink2description="DigiKey Link", componentlink2url=https://www.digikey.com/en/products/detail/murata-electronics/GRT188R61C106ME13D/5416740, lastupdated="12/20/2023 8:09:24 PM", Lifecycle Status=Active, Minimum Order=1, Mounting Type="Surface Mount, MLCC", Package / Case="0603 (1608 Metric)", packaging=TapeAndReel, Part Number=GRT188R61C106ME13D, Part Status=Active, partid=2515, price=0.06, series=GRT, Size / Dimension="0.063\" L x 0.031\" W (1.60mm x 0.80mm)", Supplier 1=DigiKey, Thickness (Max)="0.035\" (0.90mm)"
FID1 FID2 FID3 FID4 FID5 FID6 FID7 FID8: "PCB fiducial"
J1: library part 000973, Manufacturer=Samtec, created_on="4/3/2013 1:34:16 PM", id=24153, inventory_price=3.86, Manufacturer_PN=QTE-020-01-F-D-A, PartNumber=000973, parttype=Connector, rohs=1, updated_on="2/26/2018 2:13:14 PM"
J2: library part 002062, "Tag-Connect 6-pin Plug-of-Nails spring-pin cable footprint", Manufacturer=Tag-Connect, Manufacturer_PN=TC2030-IDC, AligniPartNumber=002062, parttype=Connector
J3: "CONN RCP USB3.1 TYPEC 24P SMD RA", Current Rating (Amps)="0.25A, 1A, 5A", Manufacturer=Molex, Operating Temperature="-30°C ~ 85°C", Supplier Part Number 1=WM12856CT-ND, Voltage - Rated=30VAC/DC, componentlink1description=Datasheet, componentlink1url=https://www.molex.com/pdm_docs/ps/PS-105448-001.pdf, componentlink2description="DigiKey Link", componentlink2url=http://digikey.com/product-detail/en/molex/1054500101/WM12856CT-ND/5843891, Connector Type="USB - C (Type - C)", Gender=Receptacle, lastupdated="6/6/2020 2:14:04 AM", Lifecycle Status=Active, Mating Cycles=10000, Minimum Order=1, Mounting Feature=Horizontal, Mounting Type="Surface Mount, Right Angle; Through Hole", Number of Contacts=24, Number of Ports=1, packaging=TapeAndReel, Part Number=1054500101, Part Status=Active, price=1.22, series=105445, Shielding=Shielded, Specifications="USB 3.1 (USB 3.1 Gen 2, Superspeed+)", Supplier 1=DigiKey, Termination=Solder
MH1 MH2 MH3 MH4 MH5 MH6: "Mounting hole"
R1 R4: library part RT0603FRE0710KL, "RES SMD 10K OHM 1% 1/10W 0603", Device Package="0603 (1608 Metric)", Manufacturer=Yageo, Operating Temperature="-55°C ~ 155°C", Power (Watts)="0.1W, 1/10W", Resistance="10 kOhms", Supplier Device Package=0603, Supplier Part Number 1=YAG2321CT-ND, Temperature Coefficient=±50ppm/°C, Tolerance=±1%, componentlink1description=Datasheet, componentlink1url=https://www.yageo.com/upload/media/product/productsearch/datasheet/rchip/PYu-RT_1-to-0.01_RoHS_L_11.pdf, componentlink2description="DigiKey Link", componentlink2url=https://www.digikey.com/en/products/detail/yageo/RT0603FRE0710KL/1075040, Composition="Thin Film", Height - Seated (Max)="0.022\" (0.55mm)", lastupdated="12/20/2023 8:39:02 PM", Lifecycle Status=Active, Minimum Order=1, Number of Terminations=2, Package / Case="0603 (1608 Metric)", packaging=TapeAndReel, Part Number=RT0603FRE0710KL, Part Status=Active, partid=5671, price=0.01, series=RT, Size / Dimension="0.063\" L x 0.031\" W (1.60mm x 0.80mm)", Supplier 1=DigiKey
R2: library part CR0603-FX-1601ELF, "RES SMD 1.6K OHM 1% 1/10W 0603", Device Package="0603 (1608 Metric)", Manufacturer="Bourns Inc.", Operating Temperature="-55°C ~ 155°C", Power (Watts)="0.1W, 1/10W", Resistance="1.6 kOhms", Supplier Device Package=0603, Supplier Part Number 1=CR0603-FX-1601ELFCT-ND, Temperature Coefficient=±100ppm/°C, Tolerance=±1%, componentlink1description=Datasheet, componentlink1url=https://www.bourns.com/docs/Product-Datasheets/CHPREZTR.pdf, componentlink2description="DigiKey Link", componentlink2url=https://www.digikey.com/en/products/detail/bourns-inc/CR0603-FX-1601ELF/3783762, Composition="Thick Film", Features="Moisture Resistant", Height - Seated (Max)="0.022\" (0.55mm)", lastupdated="12/20/2023 8:39:01 PM", Lifecycle Status=Active, Minimum Order=1, Number of Terminations=2, Package / Case="0603 (1608 Metric)", packaging=CutTape, Part Number=CR0603-FX-1601ELF, Part Status=Active, partid=6417, price=0.01, series=CR0603, Size / Dimension="0.063\" L x 0.031\" W (1.60mm x 0.80mm)", Supplier 1=DigiKey
R3 R5: library part CRCW020110K0FKED, "RES SMD 10K OHM 1% 1/20W 0201", Device Package="0201 (0603 Metric)", Manufacturer="Vishay Dale", Operating Temperature="-55°C ~ 155°C", Power (Watts)="0.05W, 1/20W", Supplier Device Package=0201, Supplier Part Number 1=541-10.0KAABCT-ND, Temperature Coefficient=±100ppm/°C, Tolerance=±1%, componentlink1description=Datasheet, componentlink1url=http://www.vishay.com/docs/20052/crcw0201e3.pdf, componentlink2description="DigiKey Link", componentlink2url=https://www.digikey.com/en/products/detail/vishay-dale/CRCW020110K0FKED/1967989, Composition="Thick Film", Height - Seated (Max)="0.010\" (0.26mm)", lastupdated="12/20/2023 8:19:32 PM", Lifecycle Status=Active, Minimum Order=1, Number of Terminations=2, Package / Case="0201 (0603 Metric)", packaging=TapeAndReel, Part Number=CRCW020110K0FKED, Part Status=Active, partid=29, price=0.02, Resistance="10 kOhms", series=CRCW, Size / Dimension="0.024\" L x 0.012\" W (0.60mm x 0.30mm)", Supplier 1=DigiKey
R6: library part RCS0603100KFKEA, "RES SMD 100K OHM 1% 1/4W 0603", Device Package="0603 (1608 Metric)", Manufacturer="Vishay Dale", Operating Temperature="-55°C ~ 155°C", Power (Watts)="0.25W, 1/4W", Ratings=AEC-Q200, Supplier Device Package=0603, Supplier Part Number 1=541-2800-1-ND, Temperature Coefficient=±100ppm/°C, Tolerance=±1%, componentlink1description=Datasheet, componentlink1url=http://www.vishay.com/docs/20065/rcse3.pdf, componentlink2description="DigiKey Link", componentlink2url=https://www.digikey.com/en/products/detail/vishay-dale/RCS0603100KFKEA/5866946, Composition="Thick Film", Features="Automotive AEC-Q200, Pulse Withstanding", Height - Seated (Max)="0.020\" (0.50mm)", lastupdated="12/20/2023 8:39:03 PM", Lifecycle Status=Active, Minimum Order=1, Number of Terminations=2, Package / Case="0603 (1608 Metric)", packaging=TapeAndReel, Part Number=RCS0603100KFKEA, Part Status=Active, partid=5363, price=0.01, Resistance="100 kOhms", series="RCS e3", Size / Dimension="0.061\" L x 0.033\" W (1.55mm x 0.85mm)", Supplier 1=DigiKey
R7 R10: library part RT0603FRE0710KL, "RES SMD 10K OHM 1% 1/10W 0603", Device Package="0603 (1608 Metric)", Manufacturer=Yageo, Operating Temperature="-55°C ~ 155°C", Power (Watts)="0.1W, 1/10W", Supplier Device Package=0603, Supplier Part Number 1=YAG2321CT-ND, Temperature Coefficient=±50ppm/°C, Tolerance=±1%, componentlink1description=Datasheet, componentlink1url=https://www.yageo.com/upload/media/product/productsearch/datasheet/rchip/PYu-RT_1-to-0.01_RoHS_L_11.pdf, componentlink2description="DigiKey Link", componentlink2url=https://www.digikey.com/en/products/detail/yageo/RT0603FRE0710KL/1075040, Composition="Thin Film", Height - Seated (Max)="0.022\" (0.55mm)", lastupdated="12/20/2023 8:39:02 PM", Lifecycle Status=Active, Minimum Order=1, Number of Terminations=2, Package / Case="0603 (1608 Metric)", packaging=TapeAndReel, Part Number=RT0603FRE0710KL, Part Status=Active, partid=5671, price=0.01, Resistance="10 kOhms", series=RT, Size / Dimension="0.063\" L x 0.031\" W (1.60mm x 0.80mm)", Supplier 1=DigiKey
R8 R9: library part TNPW06035K10BYEN, "RES 5.1K OHM 0.1% 1/10W 0603", Device Package="0603 (1608 Metric)", Manufacturer="Vishay Dale", Operating Temperature="-55°C ~ 155°C", Power (Watts)="0.125W, 1/8W", Ratings=AEC-Q200, Supplier Device Package=0603, Supplier Part Number 1=541-9831-1-ND, Temperature Coefficient=±10ppm/°C, Tolerance=±0.1%, componentlink1description=Datasheet, componentlink1url=http://www.vishay.com/docs/28758/tnpw_e3.pdf, componentlink2description="DigiKey Link", componentlink2url=http://digikey.com/product-detail/en/vishay-dale/TNPW06035K10BYEN/541-9831-1-ND/9562456, Composition="Thin Film", Features="Anti-Sulfur, Automotive AEC-Q200, Moisture Resistant", Height - Seated (Max)="0.022\" (0.55mm)", lastupdated="12/20/2023 8:39:04 PM", Lifecycle Status=Active, Minimum Order=1, Number of Terminations=2, Package / Case="0603 (1608 Metric)", packaging=TapeAndReel, Part Number=TNPW06035K10BYEN, Part Status=Active, partid=5273, price=0.27, Resistance="5.1 kOhms", series="TNPW e3", Size / Dimension="0.061\" L x 0.033\" W (1.55mm x 0.85mm)", Supplier 1=DigiKey
R11: library part MCT0603MD1500BP100, "RES SMD 150 OHM 0.1% 1/8W 0603", Device Package="0603 (1608 Metric)", Manufacturer="Vishay Beyschlag", Operating Temperature="-55°C ~ 155°C", Power (Watts)="0.125W, 1/8W", Ratings=AEC-Q200, Supplier Device Package=0603, Supplier Part Number 1=MCT0603-150-MBCT-ND, Temperature Coefficient=±25ppm/°C, Tolerance=±0.1%, componentlink1description=Datasheet, componentlink1url=http://www.vishay.com/docs/28785/mcat_pre.pdf, componentlink2description="DigiKey Link", componentlink2url=http://digikey.com/product-detail/en/vishay-beyschlag/MCT0603MD1500BP100/MCT0603-150-MBCT-ND/2092134, Composition="Thin Film", Features="Anti-Sulfur, Automotive AEC-Q200", Height - Seated (Max)="0.022\" (0.55mm)", lastupdated="12/21/2023 8:41:04 PM", Lifecycle Status=Active, Minimum Order=1, Number of Terminations=2, Package / Case="0603 (1608 Metric)", packaging=TapeAndReel, Part Number=MCT0603MD1500BP100, Part Status=Active, partid=5246, price=0.23, Resistance="150 Ohms", series="MCT AT - Precision", Size / Dimension="0.061\" L x 0.033\" W (1.55mm x 0.85mm)", Supplier 1=DigiKey
R12 R13: library part CMP0603AFX-3300ELF, "RESHIGHPOWERA 0603 330R 1% 1/4W", Device Package="0603 (1608 Metric)", Manufacturer="Bourns Inc.", Operating Temperature="-55°C ~ 155°C", Power (Watts)="0.25W, 1/4W", Ratings=AEC-Q200, Supplier Device Package=0603, Supplier Part Number 1=118-CMP0603AFX-3300ELFCT-ND, Temperature Coefficient=±100ppm/°C, Tolerance=±1%, componentlink1description=Datasheet, componentlink1url=https://www.bourns.com/docs/Product-Datasheets/CMP-A.pdf, componentlink2description="DigiKey Link", componentlink2url=https://www.digikey.com/en/products/detail/bourns-inc/CMP0603AFX-3300ELF/12333647, Composition="Thick Film", Features="Anti-Sulfur, Automotive AEC-Q200, Moisture Resistant, Pulse Withstanding", Height - Seated (Max)="0.022\" (0.55mm)", lastupdated="12/26/2023 8:37:22 PM", Lifecycle Status=Active, Minimum Order=1, Number of Terminations=2, Package / Case="0603 (1608 Metric)", packaging=TapeAndReel, Part Number=CMP0603AFX-3300ELF, Part Status=Active, partid=62133, price=0.02, Resistance="330 Ohms", series=CMP-A, Size / Dimension="0.063\" L x 0.031\" W (1.60mm x 0.80mm)", Supplier 1=DigiKey
TP5 TP6 TP7 TP8 TP9 TP10 TP11: "Test point, surface-mount, 20mil"
U1: library part 001552, "8-bit MCU, 4 KB flash, 256 bytes EEPROM", Manufacturer=Microchip, Manufacturer_PN=ATTINY44A-MU, PartNumber=001552, updated_on="5/23/2017 10:51:21 AM", x_lifecycle_status=Production
U2: library part CMP-004-000002-2, "USB Bus Controller, CMOS"
U3: library part CMP-004-000003-1, "Comparator, 1 Func, 10000uV Offset-Max, 75ns Response Time, CMOS, PDSO5"
U4: library part CMP-004-000004-3, "Differential Multiplexer, 2 Func, 2 Channel, PQCC20"
Y1: library part ABLS-30.000MHZ-B4-F-T, "CRYSTAL 30.0000MHZ 18PF SMD", ESR (Equivalent Series Resistance)="40 Ohms", Frequency Stability=±50ppm, Frequency Tolerance=±30ppm, Load Capacitance=18pF, Manufacturer="Abracon LLC", Operating Mode=Fundamental, Operating Temperature="-20°C ~ 70°C", Package / Case=HC-49/US, Supplier Part Number 1=535-10238-2-ND, componentlink1description=Datasheet, componentlink1url=https://abracon.com/Resonators/abls.pdf, componentlink2description="DigiKey Link", componentlink2url=http://digikey.com/product-detail/en/abracon-llc/ABLS-30.000MHZ-B4-F-T/535-10238-2-ND/2184181, Frequency=30MHz, Height - Seated (Max)="0.165\" (4.20mm)", lastupdated="12/20/2023 9:30:41 PM", Lifecycle Status=Active, Minimum Order=0, Mounting Type="Surface Mount", packaging=TapeAndReel, Part Number=ABLS-30.000MHZ-B4-F-T, Part Status=Active, partid=160, price=0.18, series=ABLS, Size / Dimension="0.449\" L x 0.185\" W (11.40mm x 4.70mm)", Supplier 1=DigiKey, Type="MHz Crystal"

## Via types
v1: diameter 20, hole 8, L1-TOP to L4-BOT, tented both sides, 57 vias
v2: diameter 20, hole 8, L1-TOP to L4-BOT, 47 vias
v3: diameter 50, hole 28, L1-TOP to L4-BOT, 14 vias
v4: diameter 19.68, hole 7.87, L1-TOP to L4-BOT, 3 vias

## Nets (pads, with @x,y where several pads share a name; then routed paths per layer and width w, separated by ;. In a path a pad name is that pad's centre, name@x,y a point inside that pad or via, vN(x,y) a via of type N, cw(c..) or ccw(c..) an arc to the next point about the centre after c; other vN are vias at no path point)
+1.0V: C1.2 U2.1 U2.23 U2.26 U2.31 U2.37 U2.50 | length 1073.8
  L1-TOP w5: U2.1@744.09,-1299.21 783.46,-1299.21 ; U2.50@874.02,-1263.78 874.02,-1295.28 ; U2.23@905.51,-1539.37 905.51,-1507.87 ; U2.26@952.76,-1539.37 952.76,-1510.8 949.83,-1507.87 905.51,-1507.87 ; U2.31@1019.69,-1472.44 1003.51,-1472.44 994.24,-1481.71 994.24,-1483.78 981.96,-1496.06 v2(980.32,-1496.06) 980.32,-1377.95 ; U2.37@1019.69,-1377.95 980.32,-1377.95 ; 783.46,-1299.21 787.4,-1295.28 874.02,-1295.28 ; 783.46,-1299.21 783.46,-1503.94 787.4,-1507.87 905.51,-1507.87 ; 874.02,-1295.28 977.39,-1295.28 980.32,-1298.2 980.32,-1377.95
  L4-BOT w5: v2(980.32,-1496.06) C1.2@980.32,-1417.32
+3.3V: "+3.3V PWR.1" C2.2 C3.2 C4.2 C5.2 C6.2 C7.2 C8.2 C12.1 C14.2 C17.2 C18.1 C19.2 J1.39 J1.40 J2.2 R1.2 R3.2 R4.2 R5.2 R6.2 R7.2 U1.9 U2.15 U2.19 U2.22 U2.30 U2.38 U2.44 U2.52 U3.2 U4.6 | length 11193.8
  L1-TOP w5: R6.2@218.5,-2326.77 214.57,-2322.83 117.1,-2322.83 114.17,-2319.91 114.17,-2228.35 ; C14.2@484.25,-2215.55 473.43,-2204.72 U3.2@310.03,-2204.72 287.87,-2204.72 278.03,-2214.57 R7.2@185.04,-2214.57 127.95,-2214.57 114.17,-2228.35 ; R1.2@584.65,-1452.76 574.59,-1442.71 445.52,-1442.71 377.95,-1375.13 v3(377.95,-1330.71) ; R4.2@586.61,-1377.95 586.61,-1375.98 572.38,-1361.75 570.41,-1361.75 539.37,-1330.71 v3(377.95,-1330.71) ; v2(696.85,-1535.43) 778.2,-1535.43 779.53,-1536.76 U2.15@779.53,-1539.37 ; v2(842.52,-1582.68) U2.19@842.52,-1539.37 ; U2.52@842.52,-1263.78 842.52,-1193.04 850.39,-1185.16 v2(850.39,-1181.1) ; U4.6@866.14,-2169.29 v2(866.14,-2133.86) ; U2.22@889.76,-1539.37 889.76,-1574.68 897.64,-1582.56 v2(897.64,-1586.61) ; U2.44@968.5,-1263.78 968.5,-1129.92 v2(984.25,-1114.17) ; U2.30@1019.69,-1488.19 C6.2@1095.47,-1488.19 1090.55,-1493.11 v3(1090.55,-1708.66) 1090.55,-1759.84 964.57,-1885.83 964.57,-1909.45 ; U2.38@1019.69,-1362.2 C2.2@1173.23,-1362.2 1173.23,-1360.24 1246.06,-1287.4 v2(1283.46,-1287.4) ; C19.2@1040.35,-2066.93 1002.62,-2066.93 990.01,-2079.54 967.5,-2079.54 964.57,-2076.61 964.57,-1988.19 ; C18.1@1040.35,-1988.19 964.57,-1988.19 ; C17.2@1040.35,-1909.45 964.57,-1909.45 ; 1440.94,-1803.15 v3(1440.94,-1708.66) ; 114.17,-2228.35 98.43,-2212.6 98.43,-1239.57 v1(190,-1148) 192.62,-1148 375.33,-1330.71 v3(377.95,-1330.71) ; 964.57,-1988.19 964.57,-1909.45
  L1-TOP w7: v1(190,-1148) 190,-1070.24 J2.2@202.36,-1057.87
  L3-3.3V w50: 392,-423.5 392,-220 537,-75 1162.62,-75 v1(1213.75,-126.13) ; v3(1090.55,-1708.66) v3(1440.94,-1708.66) 1500,-1708.66 1543.31,-1665.35 1543.31,-1307.09 1303.15,-1066.93 1303.15,-696.15 1201.44,-594.44 1201.44,-413.39 v1(1212.6,-413.39) ; v1(1214,-181.69) v1@1214,-126.13
  L4-BOT w4: v1(614.03,-672.98) 640.7,-672.98 C12.1@641.73,-674.02 ; J1.39@1185.13,-397.24 1185.13,-406.33 1192.18,-413.39 v1(1212.6,-413.39)
  L4-BOT w5: v3(377.95,-1330.71) 377.95,-1375.13 480.14,-1477.32 682.04,-1477.32 ; R5.2@533.46,-787.4 550.05,-787.4 561.87,-799.21 v2(562.99,-799.21) ; v2(696.85,-1535.43) C5.2@740.16,-1535.43 ; v2(850.39,-1181.1) 850.39,-1277.56 826.77,-1301.18 C3.2@826.77,-1303.15 ; v2(866.14,-2133.86) 866.14,-1933.07 v3(1090.55,-1708.66) ; C8.2@929.13,-1542.49 927.17,-1542.49 911.95,-1557.71 911.95,-1559.68 900.51,-1571.12 900.51,-1583.74 v2(897.64,-1586.61) ; v2(984.25,-1114.17) 944.88,-1153.54 C4.2@944.88,-1302 943.73,-1303.15 C3.2@826.77,-1303.15 ; v2(1283.46,-1287.4) 1326.77,-1330.71 1326.77,-1615.18 1284.34,-1657.62 1141.6,-1657.62 v3(1090.55,-1708.66) ; 682.04,-1477.32 C5.2@740.16,-1535.43 ; 682.04,-1477.32 708.66,-1450.7 708.66,-1342.52 748.03,-1303.15 C3.2@822.83,-1303.15 C3.2@826.77,-1303.15 ; C5.2@740.16,-1535.43 742.13,-1537.4 C5.2@744.09,-1537.4 C7.2@815.13,-1537.4 830.15,-1552.42 830.15,-1570.3 v2(842.52,-1582.68) 844.49,-1584.65 895.67,-1584.65 v2(897.64,-1586.61) ; v2(897.64,-1586.61) 968.5,-1586.61 v3(1090.55,-1708.66)
  L4-BOT w7: v1(190,-1148) 209.98,-1167.98 253.02,-1167.98 267,-1154 267,-1072.51 J2.2@252.36,-1057.87 ; R3.2@579.72,-487 579.72,-461.28 v1(580,-461)
  L4-BOT w9: U1.9@582.74,-671.69 582.9,-671.85 612.9,-671.85 v1(614.03,-672.98)
  L4-BOT w50: v1(1212.6,-413.39) 1376.11,-413.39 1379,-410.5 1379,-233 1300.13,-154.13 v1(1213.75,-154.13)
+5V: J1.2 | length 38
  L1-TOP w50: 551,-174 551,-136
  other v1: 558,-181.74 557.75,-154.18 558,-125.74
BE0: J1.12 U2.2 | length 1256.5
  L1-TOP w5.25: U2.2@744.09,-1314.96 696.85,-1314.96 671.67,-1289.78 671.67,-539.52 743.38,-467.81 743.38,-235.37 734,-226 734,-206.12 v1(744.13,-196)
  L4-BOT w5.25: v1(744.13,-196) J1.12@744.13,-153.94
BE1: J1.10 U2.3 | length 1280.7
  L1-TOP w5.25: v1(712.63,-196) 722.75,-206.12 722.75,-230.66 732.13,-240.03 732.13,-464.57 661.42,-535.27 661.42,-1303.15 688.98,-1330.71 U2.3@744.09,-1330.71
  L4-BOT w5.25: v1(712.63,-196) J1.10@712.63,-153.94
C2P_CLKN: J1.36
C2P_CLKP: J1.34
CC1: J3.A5 R6.1 R8.1 U3.3 | length 1095.6
  L1-TOP w4: J3.A5@872.05,-2452.76 872.05,-2383.86 v2(885.83,-2370.08)
  L1-TOP w5: R6.1@269.69,-2326.77 311.02,-2326.77 ; U3.3@310.03,-2242.13 311.02,-2243.12 311.02,-2326.77 ; v2(413.39,-2362.2) 363.39,-2362.2 327.95,-2326.77 311.02,-2326.77
  L4-BOT w4: 566.16,-2522.85 627.24,-2583.93 853.5,-2583.93 868.13,-2569.3 868.13,-2410.98 885.83,-2393.28 v2(885.83,-2370.08)
  L4-BOT w5: v2(413.39,-2362.2) 566.16,-2514.98 566.16,-2522.85
CC2: J3.B5 R9.1 U3.4 | length 932.5
  L1-TOP w4: v2(937.01,-2610.24) 938.98,-2608.27 938.98,-2505.91 J3.B5@940.94,-2503.94
  L1-TOP w5: U3.4@398.63,-2242.13 398.63,-2288.4 407.38,-2297.14 436.78,-2297.14 442.58,-2291.34 R9.1@486.22,-2291.34 486.22,-2293.31 551.18,-2358.27 v2(578.74,-2358.27)
  L3-3.3V w4: 578.74,-2413.39 578.74,-2519.68 676.65,-2617.59 909.93,-2617.59 917.28,-2610.24 v2(937.01,-2610.24)
  L3-3.3V w5: 578.74,-2413.39 v2(578.74,-2358.27)
CLK: J1.30 U2.43 | length 1168.7
  L1-TOP w6: U2.43@984.25,-1263.78 984.25,-1161.42 1072,-1073.67 1072,-239 1029,-196 v1(1027.63,-196)
  L1-TOP w7: v1(1027.63,-196) v1@1030,-198.37
  L4-BOT w7: v1(1027.63,-196) J1.30@1027.63,-153.94
DA_N: J3.A7 J3.B7 U2.20 | length 1400.2
  L1-TOP w4: v2(838.58,-1775.59) 826.83,-1763.84 826.83,-1696.79 846.52,-1677.11 846.52,-1602.02 848.86,-1599.68 849.56,-1599.68 859.52,-1589.72 859.52,-1573.57 858.27,-1572.32 U2.20@858.27,-1539.37 ; v2(901.57,-2600.59) 901.57,-2596.41 894.01,-2588.84 887.38,-2588.84 877.57,-2579.04 877.57,-2556.11 907.42,-2526.26 907.42,-2517.65 901.57,-2511.81 J3.B7@901.57,-2503.94 ; J3.A7@931.1,-2452.76 917.76,-2452.76 915.42,-2450.41 915.42,-2432.38 915.42,-2415.73 917.76,-2413.39 v2(933.07,-2413.39)
  L3-3.3V w4: v2(838.58,-1775.59) 826.83,-1787.34 826.83,-2045.33 809.93,-2062.24 809.93,-2330.03 866.97,-2387.08 898.08,-2387.08 915.42,-2404.42 915.42,-2411.04 917.76,-2413.39 v2(933.07,-2413.39)
  L4-BOT w4: v2(901.57,-2600.59) 901.57,-2596.41 909.14,-2588.84 915.77,-2588.84 925.57,-2579.04 925.57,-2500.32 915.42,-2490.16 915.42,-2415.73 917.76,-2413.39 v2(933.07,-2413.39)